# Altium PCB SIM7600_M_V2.0.1.PcbDoc
Units mil, origin at the board's own origin, x right, y up, seen from the top; angles counter-clockwise.
Board outline 5890 x 4596 mil, 4 copper layers (Top Layer, GND, PWR, Bottom Layer); 106 components, 93 nets, 416 pads, 111 vias.
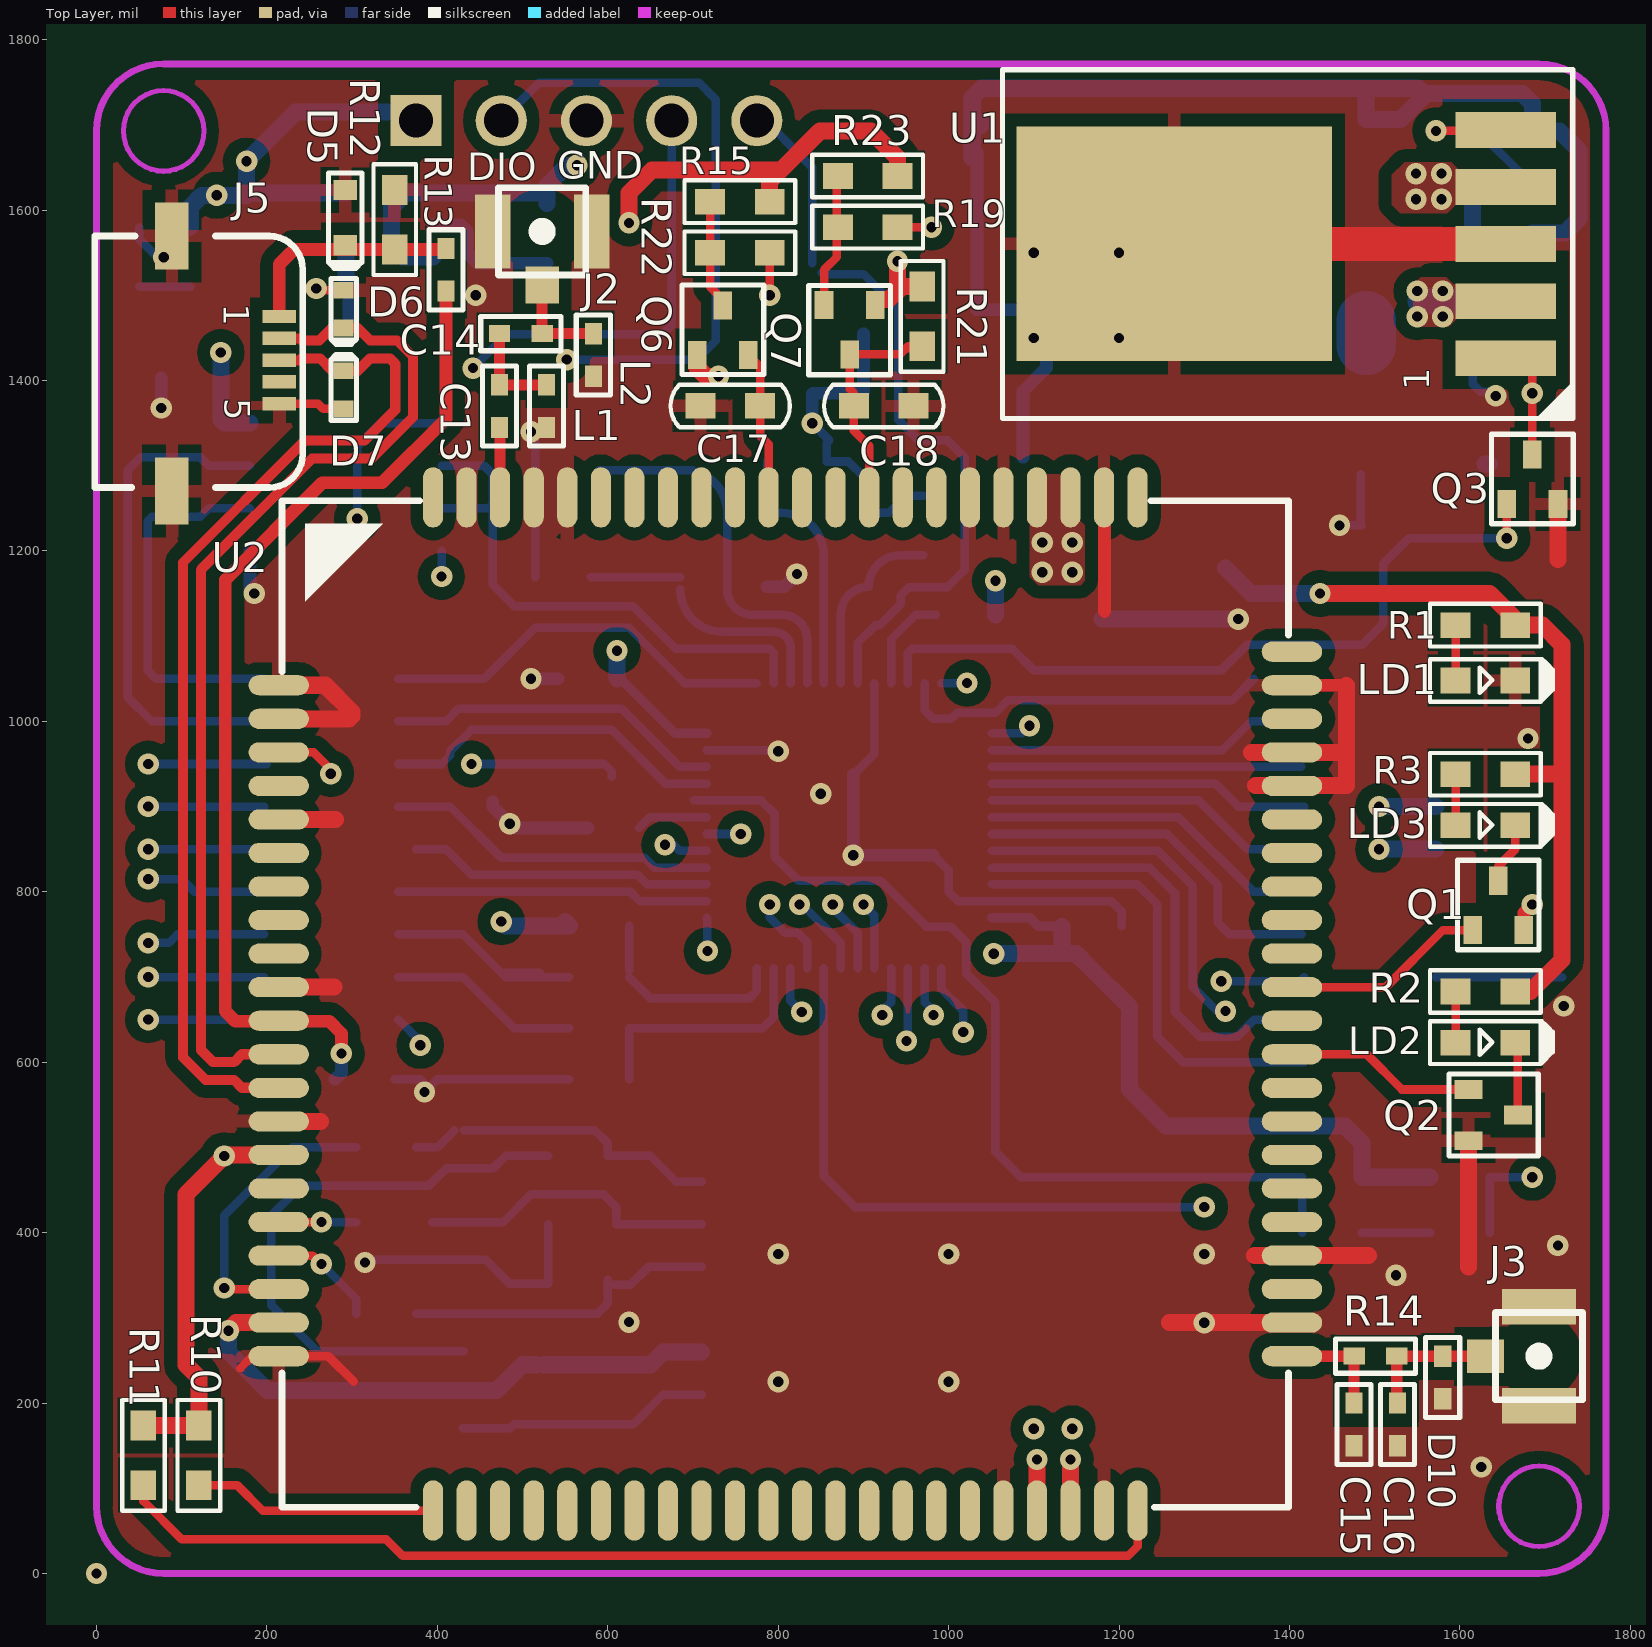
[diagram p0: Top Layer view]
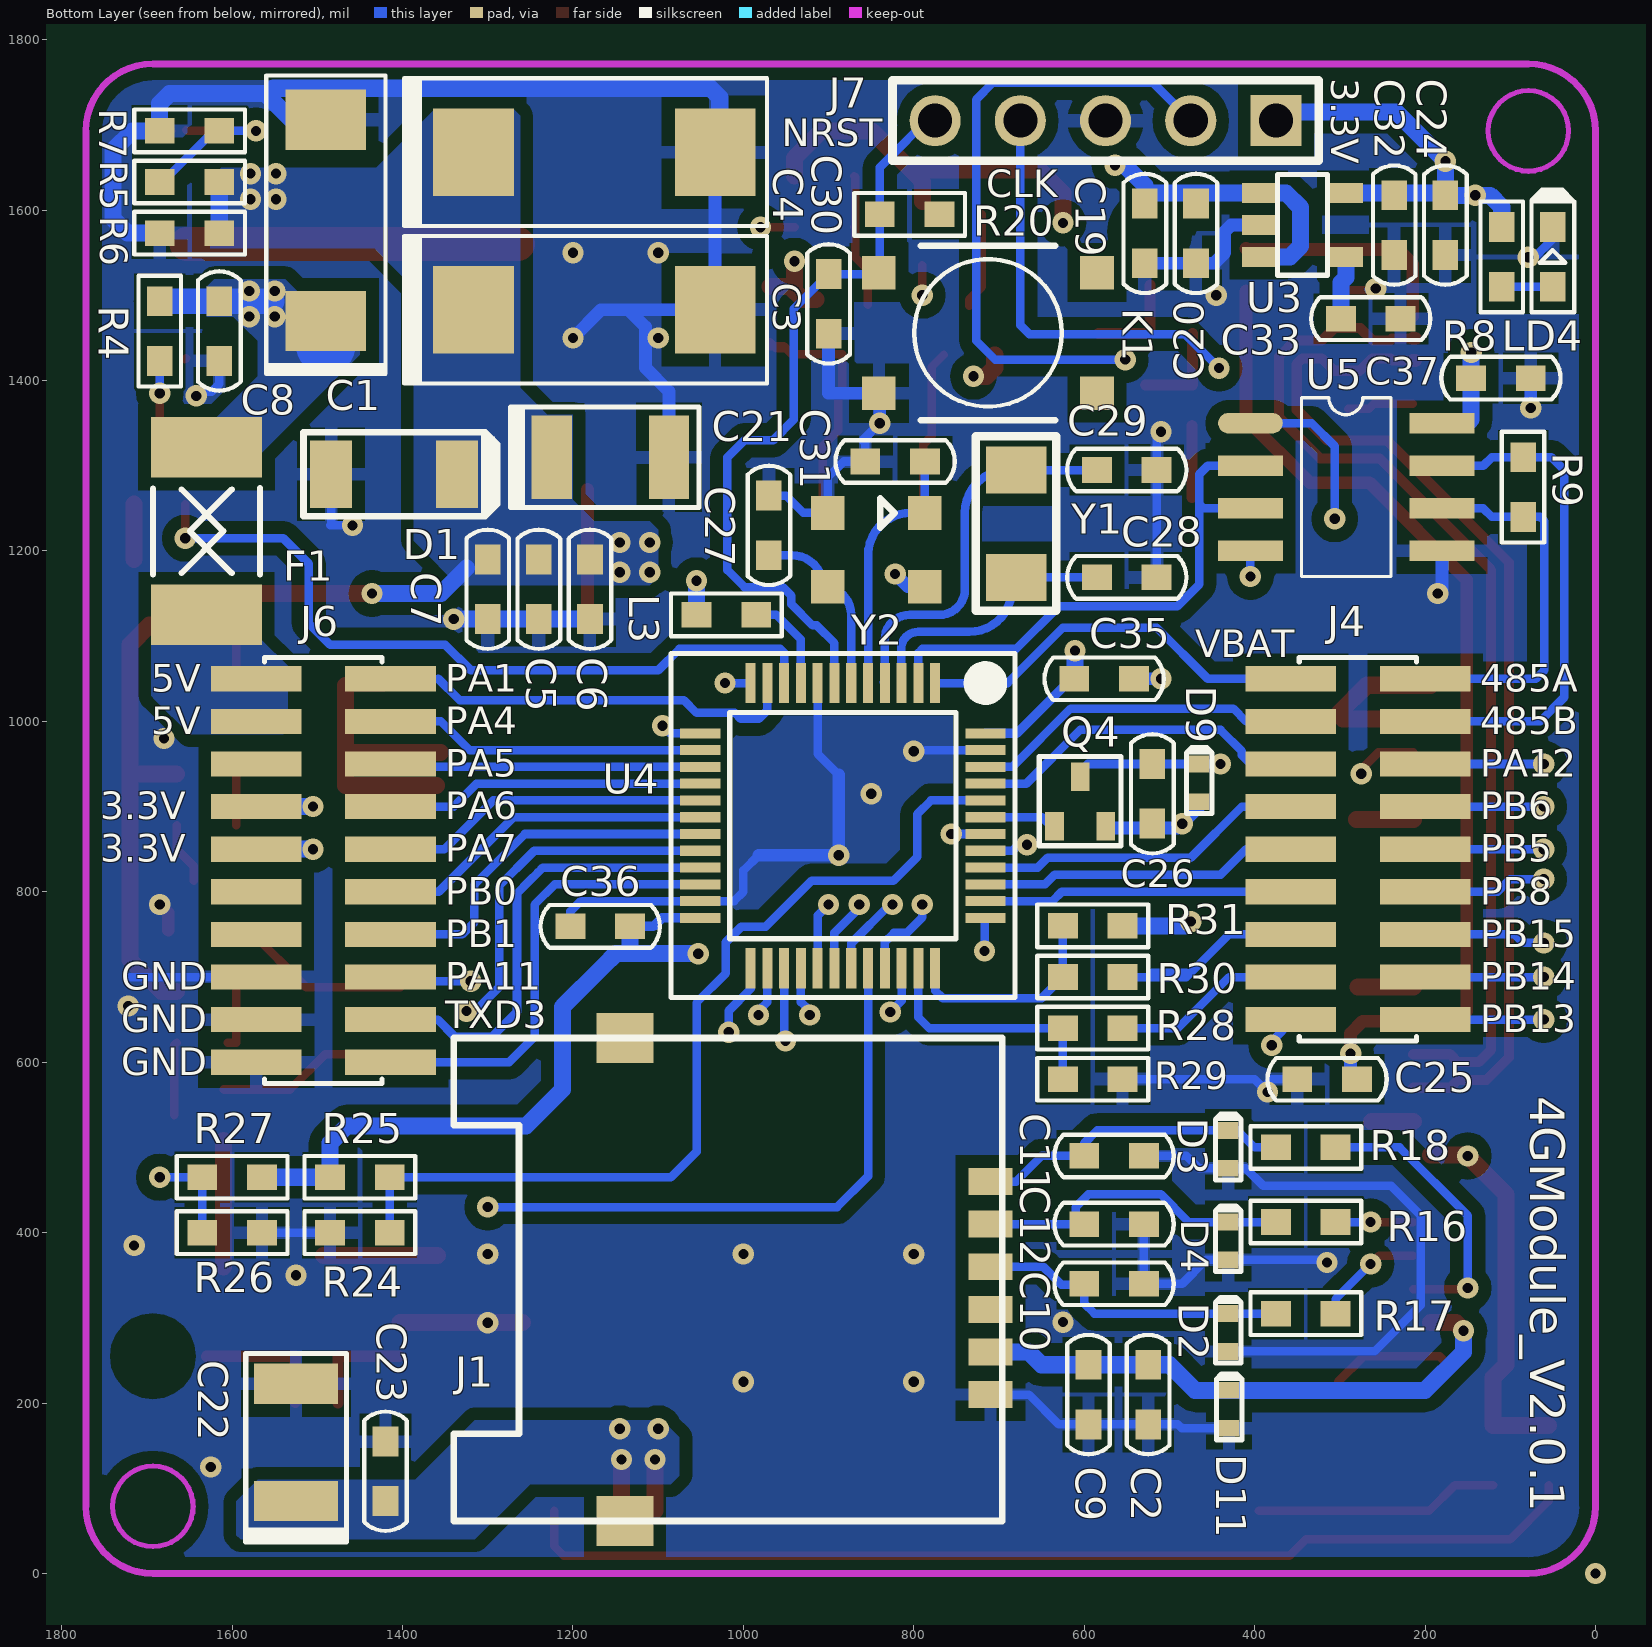
[diagram p1: Bottom Layer view, seen from below]
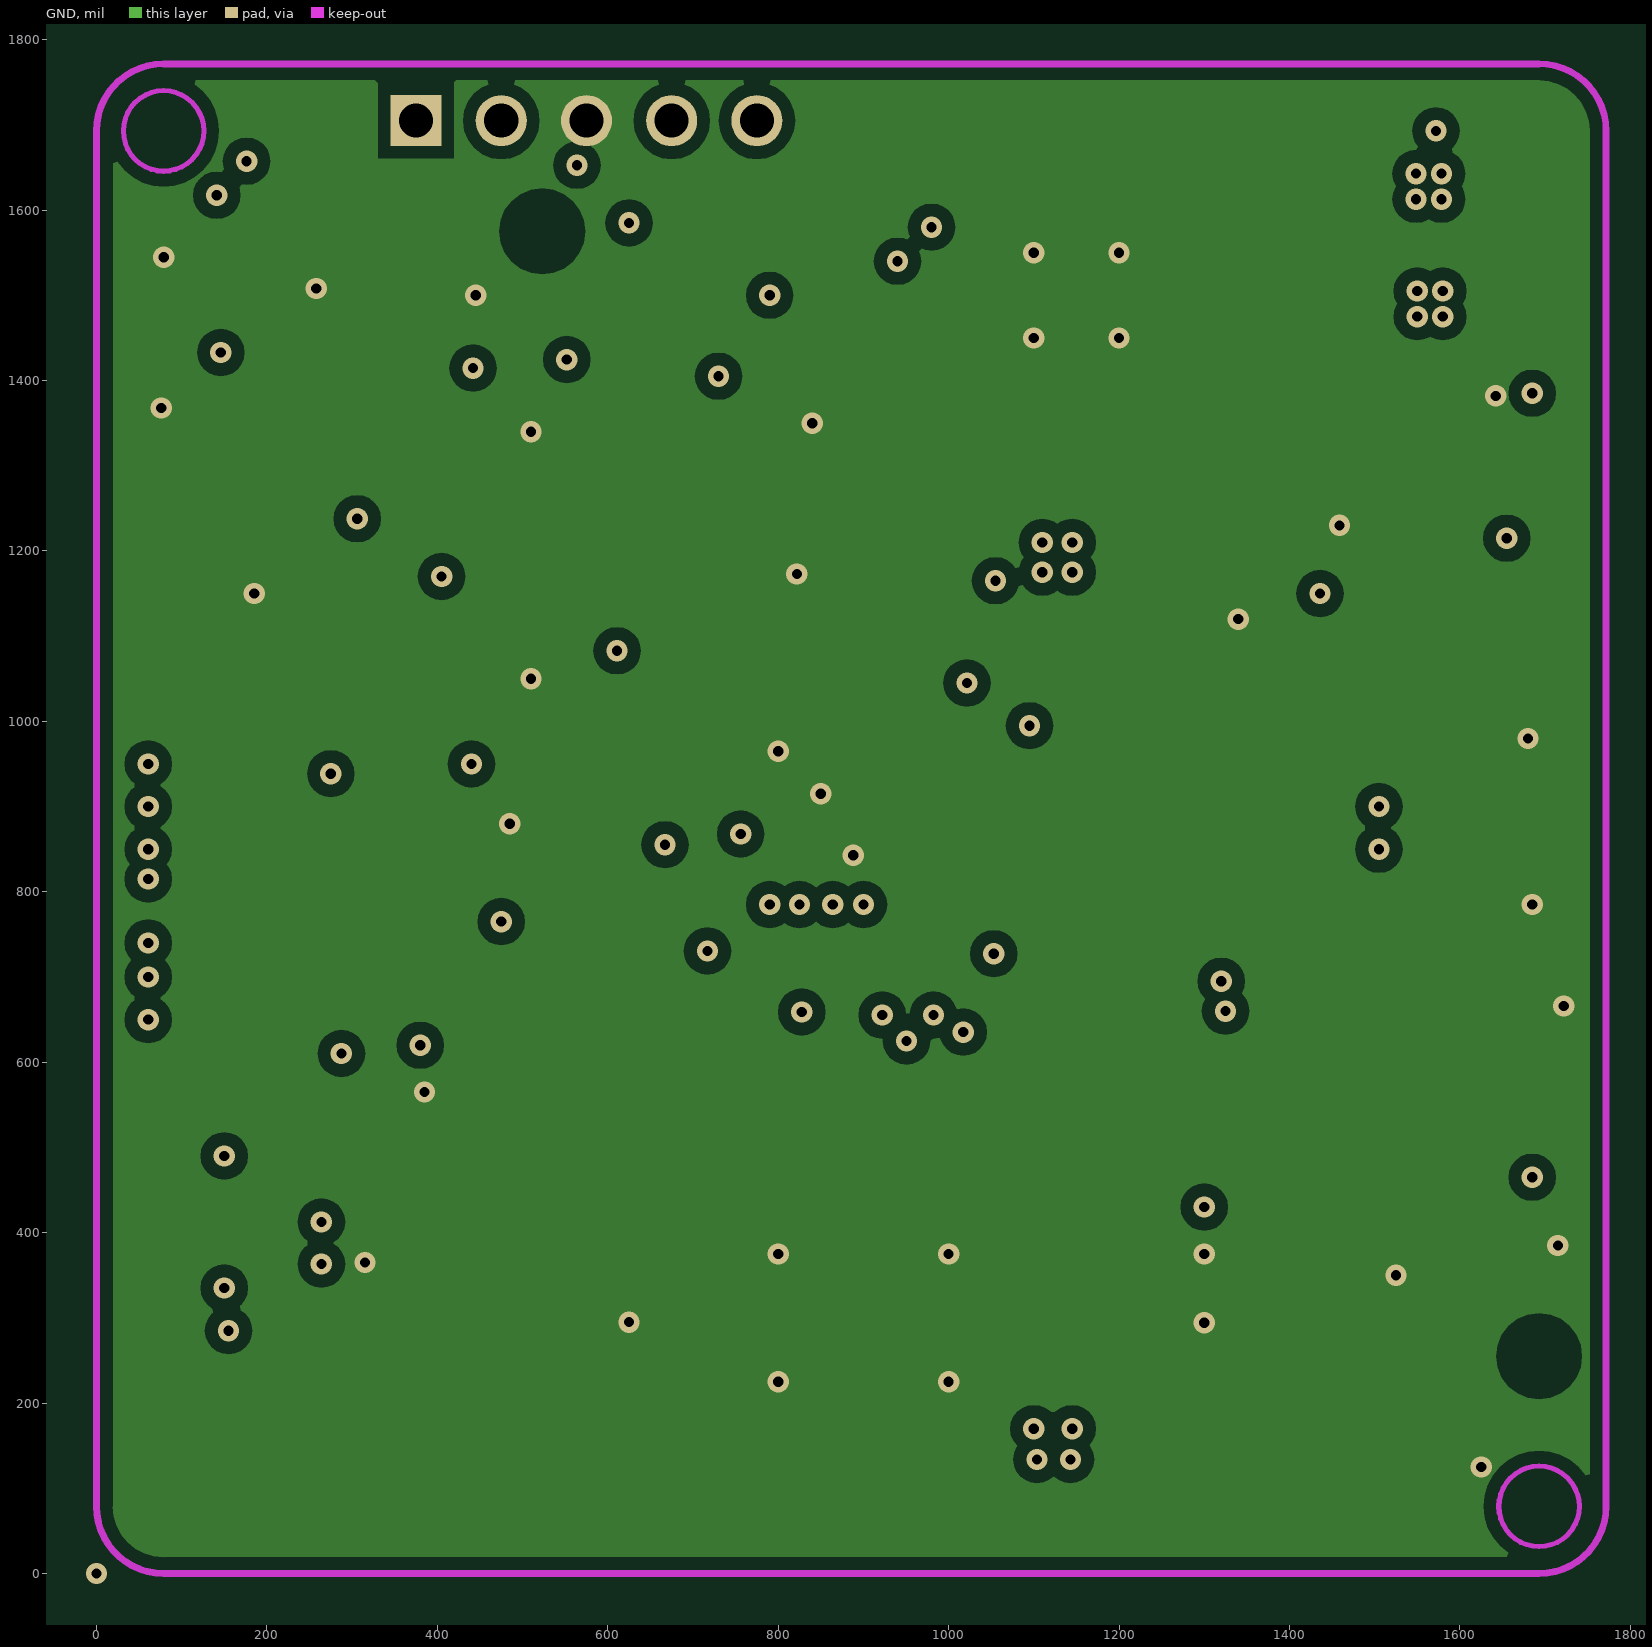
[diagram p2: GND]
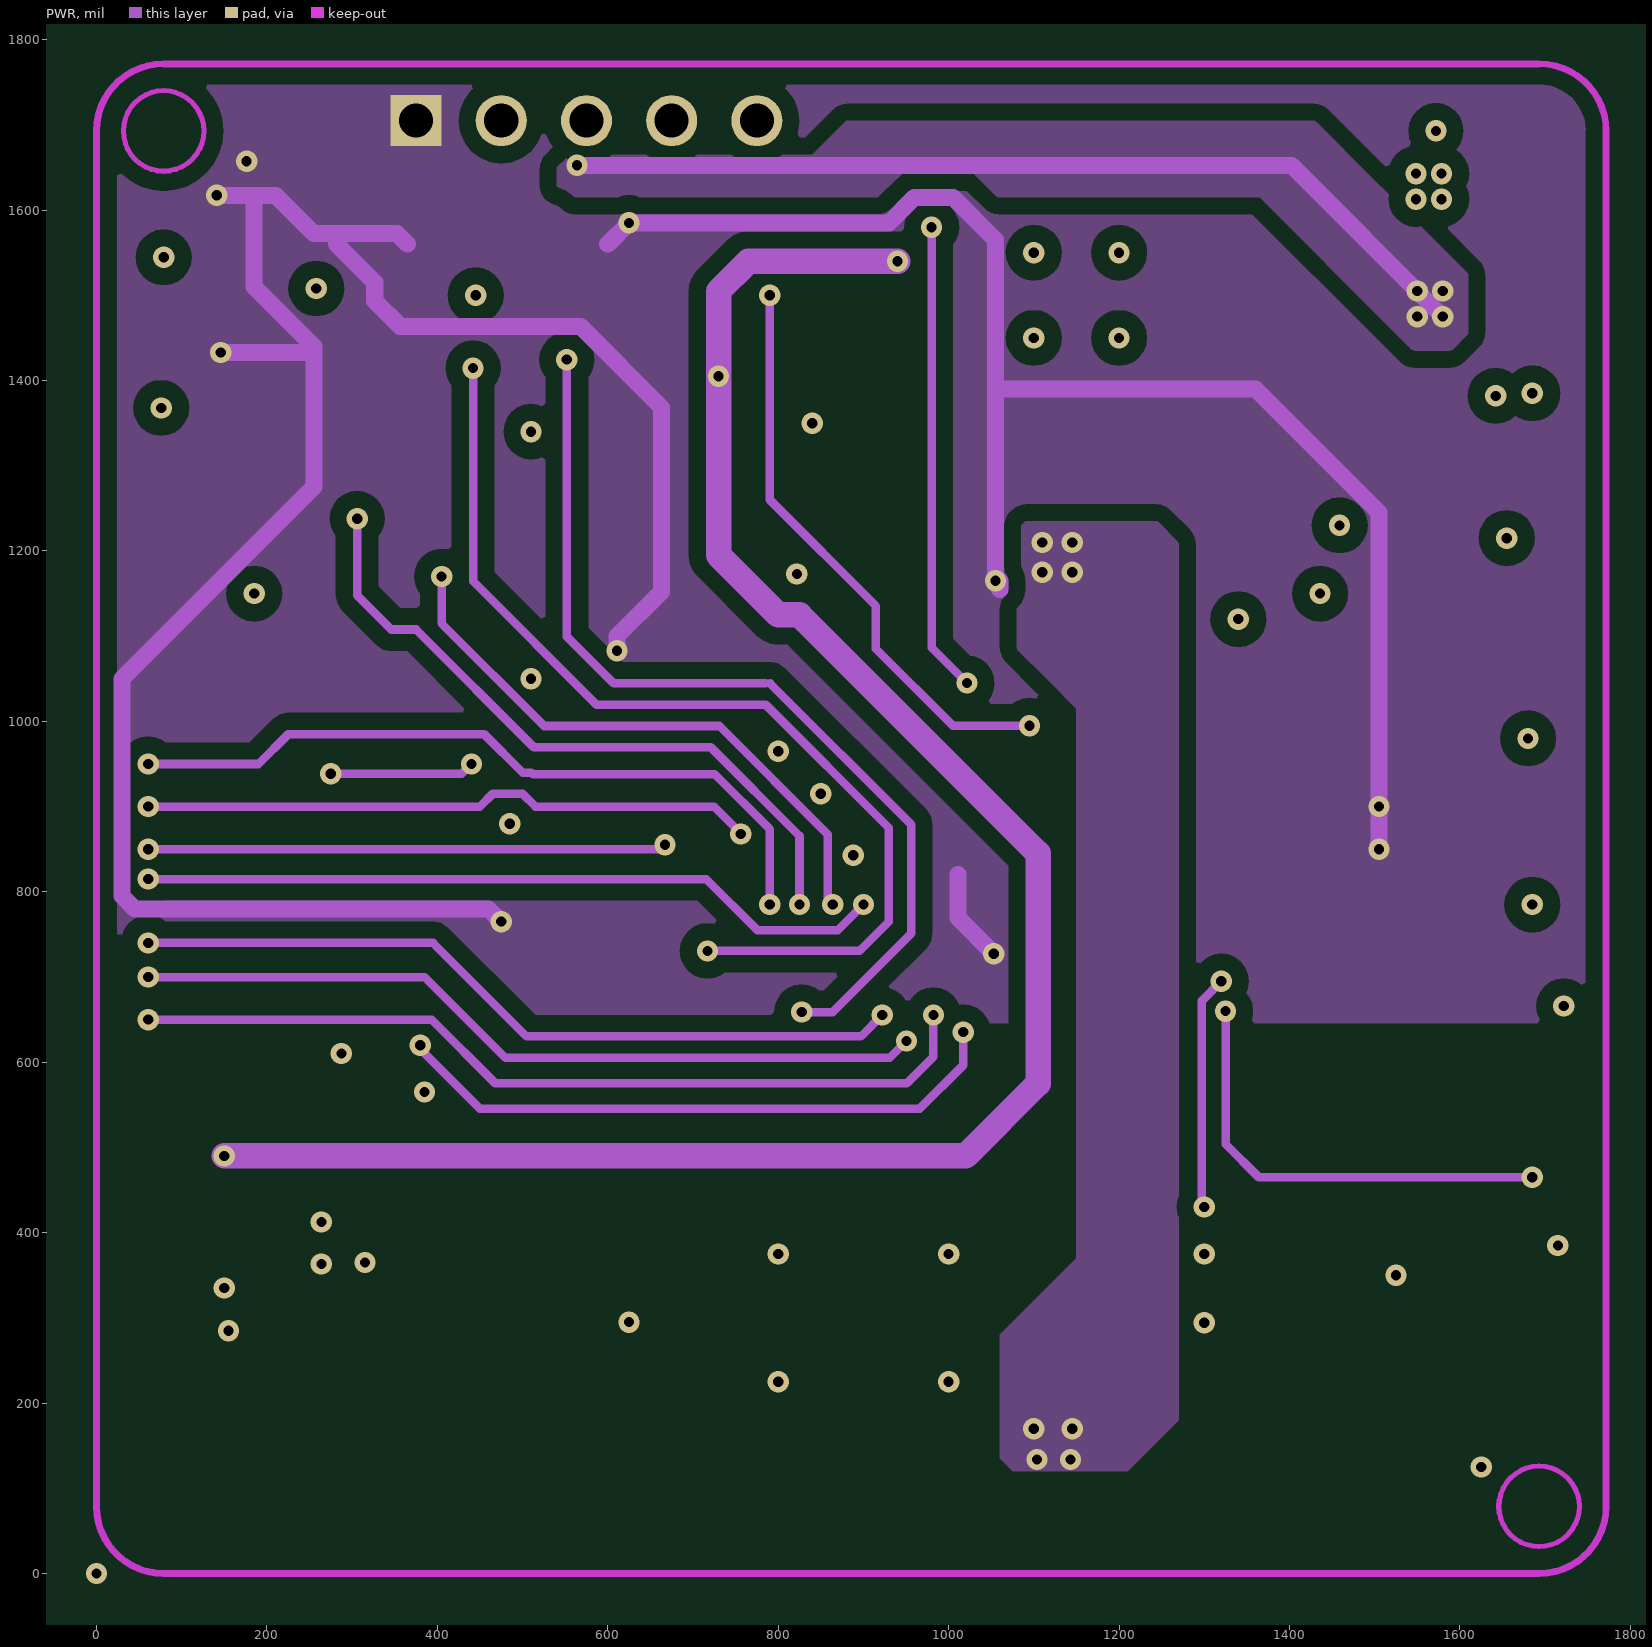
[diagram p3: PWR]

## Layer stack, top to bottom
Top Layer: signal copper 1.4
Dielectric: core 12.6, FR-4, Dk 4.8
GND: signal copper 1.4
Dielectric: prepreg 12.6, FR-4, Dk 4.8
PWR: signal copper 1.4
Dielectric: core 12.6, FR-4, Dk 4.8
Bottom Layer: signal copper 1.4

## Board outline
-1744.1,2857.4 -1744.1,-1531.6 -1698.1,-1577.6 3891.9,-1577.6 3937.9,-1531.6 4145.9,-1323.6 4145.9,2672.4 3799.9,3018.4 -1490.1,3018.4

## Design rules (kind name [scope] priority, off if disabled: settings)
Clearance [All] p1: gap=6
ComponentClearance [All] p1: gap=5 collisioncheckmode=2 verticalgap=10
DiffPairsRouting DiffPair_DiffPairsRouting [InDifferentialPair ('NewDifferentialPair1')] p1: maxlimit=100 minlimit=6 mostfreqgap=6 toplayer_mingap=9 toplayer_prefgap=9 midlayer1_mingap=9 midlayer1_prefgap=9 midlayer2_mingap=9 midlayer2_prefgap=9 bottomlayer_mingap=9 bottomlayer_prefgap=9 maxuncoupledlength=500
DiffPairsRouting [All] p2: maxlimit=100 minlimit=6 mostfreqgap=6 maxuncoupledlength=500
MatchedLengths DiffPair_MatchedLengths [InDifferentialPair ('NewDifferentialPair1')] p1: tolerance=1000 checknetsindiffpair=TRUE checkdiffpairvsdiffpair=TRUE checkothers=TRUE
PlaneClearance [All] p1: clearance=5.91
PlaneConnect [All] p1: planeconnectstyle=Relief reliefexpansion=20 reliefentries=4 reliefconductorwidth=20 reliefairgap=10
PolygonConnect [All] p1: connectstyle=Direct reliefconductorwidth=15 reliefentries=4 polygonreliefangle="90 Angle"
RoutingCorners [All] p1: cornerstyle=Round minsetback=393.7 maxsetback=393.7
RoutingVias [All] p1: holewidth=28 width=50 viastyle="Through Hole" minholewidth=12 minwidth=25 maxholewidth=50 maxwidth=50
SolderMaskExpansion [All] p1: expansion=4
TestPointUsage [All] p1: valid=0 allowmultiple=FALSE
Testpoint [All] p1: side=15 testpointundercomponent=TRUE minsize=40 maxsize=100 preferedsize=60 minholesize=0 maxholesize=40 preferedholesize=32 testpointgrid=1 style=1021 order=0123456789
Width DiffPair_Width [InDifferentialPair('NewDifferentialPair1')] p1: maxlimit=15 minlimit=12 preferedwidth=15 toplayer_prefwidth=12 midlayer1_prefwidth=12 midlayer2_prefwidth=12 bottomlayer_prefwidth=12 minimp=50.000000 maximp=50.000000 favimp=50.000000
Width [All] p2: maxlimit=200 minlimit=6 preferedwidth=15 minimp=50.000000 maximp=50.000000 favimp=50.000000
14 further rules are at their usual default settings.

## Classes and differential pairs
component class U_03-4G: C2 C9 C10 C11 C12 C13 C14 C15 C16 C17 C18 C21 C22 C23 C25 C26 D2 D3 D4 D5 D6 D7 D9 D10 D11 J1 J2 J3 J5 L1 L2 LD2 LD3 Q1 Q2 Q4 Q6 Q7 Q22 Q111 R2 R3 R10 R11 R12 R13 R14 R15 R16 R17 R18 R19 R21 R22 R23 U2
component class U_01-POWER: C1 C3 C4 C5 C6 C7 C8 C19 C20 C24 C32 C33 D1 F1 LD1 LD4 Q3 R1 R4 R5 R6 R7 R8 U1 U3
component class U_02-MCU: C27 C28 C29 C30 C31 C35 C36 C37 J4 J6 J7 K1 L3 R9 R20 R24 R25 R26 R27 R28 R29 R30 R31 U4 U5 Y1 Y2
differential pair NewDifferentialPair1: +4G_USB_P -4G_USB_N

## Components (designator, comment, footprint, x,y, rotation, side; value= is the part's Value field where it differs from the comment)
C1 "100uF/16V" C_TAN_C 1490,1588 r90 bottom
C2 "33PF" 0603_C 525,245 r270 bottom
C3 "220uF/10V" C_TAN_D 1175,1483 r180 bottom
C4 "220uF/10V" C_TAN_D 1175,1668 r180 bottom
C5 "0.1uF" 0603_C 1240,1120 r90 bottom
C6 "2.2μF" 0603_C 1180,1120 r90 bottom
C7 "33PF" 0603_C 1300,1120 r90 bottom
C8 "0.1uF" 0603_C 1615,1423.11 r90 bottom
C9 "0.1uF" 0603_C 595,245 r270 bottom
C10 "33PF" 0603_C 530,340 r0 bottom
C11 "33PF" 0603_C 530,490 r0 bottom
C12 "33PF" 0603_C 530,410 r0 bottom
C13 "27PF" 0402 473,1345 r90 top
C14 "27PF" 0402 473,1455 r0 top
C15 "NC" 0402 1475.87,150 r90 top
C16 "NC" 0402 1526.87,150 r90 top
C17 "1NF" 0603_C 778.7,1370.18 r180 top
C18 "100PF" 0603_C 958.9,1370.18 r180 top
C19 "1uF" 0603_C 528.82,1607.6 r270 bottom
C20 "0.1uF" 0603_C 468.82,1607.6 r270 bottom
C21 "47uF/10V" C_TAN_B 1225,1310 r180 bottom
C22 "47uF/10V" C_TAN_B 1525,85 r90 bottom
C23 "1uF" 0603_C 1420,155 r270 bottom
C24 "1uF" 0603_C 176.18,1617.4 r270 bottom
C25 "33PF" 0603_C 280,580 r0 bottom
C26 "0.1uF" 0603_C 520,880 r90 bottom
C27 "Cap" 0603_C 970,1195 r90 bottom
C28 "Cap" 0603_C 585,1169 r180 bottom
C29 "Cap" 0603_C 585,1295 r180 bottom
C30 "Cap" 0603_C 900,1455 r90 bottom
C31 "Cap" 0603_C 786.95,1305 r0 bottom
C32 "0.1uF" 0603_C 236.18,1617.4 r270 bottom
C33 "10nF" 0603_C 298.82,1472.6 r180 bottom
C35 "Cap" 0603_C 611.65,1050 r180 bottom
C36 "Cap" 0603_C 1133,759.41 r0 bottom
C37 "Cap" 0603_C 145.94,1402.83 r180 bottom
D1 "BZV55C5V1" SOD-80 1410,1290 r180 bottom
D2 "ESD9M5.0ST5G" SOD-923 431,305 r270 bottom
D3 "ESD9M5.0ST5G" SOD-923 431,520 r270 bottom
D4 "ESD9M5.0ST5G" SOD-923 431,412.48 r270 bottom
D5 "PESD12VS1UB" SOD523 291.72,1623.7 r90 top
D6 "ESD9L5.0ST5G" SOD-923 290,1461.54 r90 top
D7 "ESD9L5.0ST5G" SOD-923 290,1411.41 r270 top
D9 "ESD9M5.0ST5G" SOD-923 465,950 r270 bottom
D10 "LXES15AAA1-153" 0402 1579.87,255 r270 top
D11 "ESD9M5.0ST5G" SOD-923 430,215 r270 bottom
F1 "Fuse 2A" 1812_F 1630,1125 r90 bottom
J1 "SIM_Card" MicroSIM-6 710,210 r90 bottom
J2 "CON2" RF-Z 523,1575 r0 top
J3 "CON2" RF-Z 1692.87,255 r270 top
J4 "HEADER2X9" DSP1.27-1.27-18 357.48,1050 r180 bottom
J5 "USB" MICROUSB_SMD1 108,1424 r270 top
J6 "Header2X10" DSP1.27-1.27-20 1571.65,1050 r180 bottom
J7 "XH2.54-5P" SIP5 375,1705 r0 bottom
K1 "KEY" KEY_SMD5465 585,1385 r0 bottom
L1 "NC" 0402 528,1345 r90 top
L2 "NC" 0402 583,1405 r90 top
L3 "Inductor" 0603_R 1055,1125 r180 bottom
LD1 "WHITE" LED_0603 1595,1048 r0 top
LD2 "WHITE" LED_0603 1595,623 r0 top
LD3 "WHITE" LED_0603 1595,878 r0 top
LD4 "WHITE" LED_0603 50,1510 r90 bottom
Q1 "DTC143ZEBTL" SC-85 1615,755 r0 top
Q2 "DTC143ZEBTL" SC-85 1610,568 r270 top
Q3 "DTC143ZEBTL" SC-85 1655,1255 r0 top
Q4 "DTC143ZEBTL" SC-85 634.81,877 r180 bottom
Q6 "DTC143ZEBTL" SC-85 705,1430 r0 top
Q7 "DTC143ZEBTL" SC-85 913.9,1488.74 r180 top
R1 "1K" 0603_R 1665,1113 r180 top
R2 "1K" 0603_R 1665,683 r180 top
R3 "1K" 0603_R 1665,938 r180 top
R4 "47K" 0603_R 1685,1493.11 r270 bottom
R5 "100K" 0603_R 1685,1633 r180 bottom
R6 "750R" 0603_R 1685,1573 r180 bottom
R7 "47K" 0603_R 1615,1693 r0 bottom
R8 "1K" 0603_R 110,1580 r270 bottom
R9 "100Ω" 0603_R 85,1310 r270 bottom
R10 "NC" 0603_R 120.08,173.66 r270 top
R11 "NC" 0603_R 55.08,173.66 r270 top
R12 "47K" 0603_R 350,1553.74 r90 top
R13 "0R" 0402 410,1505 r90 top
R14 "0R" 0402 1525.87,255 r180 top
R15 "10K" 0603_R 790,1610 r180 top
R16 "22R" 0603_R 375,412.48 r180 bottom
R17 "22R" 0603_R 375,305 r180 bottom
R18 "22R" 0603_R 375,500 r180 bottom
R19 "0R" 0603_R 940,1580 r180 top
R20 "Res3" 0603_R 840,1595 r180 bottom
R21 "20K" 0603_R 968.9,1510.18 r270 top
R22 "0R" 0603_R 790,1550 r180 top
R23 "10K" 0603_R 870,1640 r0 top
R24 "Res3" 0603_R 1485,400 r180 bottom
R25 "Res3" 0603_R 1415,465 r0 bottom (schematic designator 25)
R26 "Res3" 0603_R 1565,400 r0 bottom
R27 "Res3" 0603_R 1635,465 r180 bottom
R28 "Res3" 0603_R 555,640 r0 bottom
R29 "Res3" 0603_R 625,580 r180 bottom
R30 "Res3" 0603_R 555,700 r0 bottom
R31 "Res3" 0603_R 625,760 r180 bottom
U1 "MIC29302" TO-263-5 1653.7,1426.18 r90 top
U2 "SIM7600CE" SIM7600 213.9,1042.4 r0 top locked
U3 "LD3985M33R" SOT23-5L 343.82,1582.6 r270 bottom
U4 "STM32F103C8T6" LQFP48 775,1045 r0 bottom
U5 "MAX3485ESA" SO8 405,1350 r180 bottom
Y1 "32.768K" 3215 680,1295 r270 bottom
Y2 "8MHz" CRY_S3225 850,1205 r270 bottom

## Footprints (in the part's own frame and the unit in brackets; to place one, negate y for a bottom-side part, rotate by r counter-clockwise, add the part's x,y. Pads: shape width x height; smd on the part's side, far side on the other; paste and mask are expansions set on the pad)
0402 [mil]
  rect 25x20 smd: 1(0,0) 2(50,0)
  silkscreen extent -22,-20 72,20
0603_C [mil]
  rect 35x30 smd: 1(0,0) 2(70,0)
  silkscreen extent -35,-25 105,25, body extent 5,-15 65,15, height 39
0603_R [mil]
  rect 35x30 smd: 1(0,0) 2(70,0)
  silkscreen extent -30,-25 100,25, body extent 5,-15 65,15, height 39
1812_F [mm]
  rect 1.8x3.3 smd: 1(0,0) 2(5,0)
  silkscreen extent 1.2,-1.6 3.78,1.6
3215 [mm]
  rect 1.4x1.8 smd: 1(0,0)
  rect 1.4x1.8 smd paste+0: 2(3.2,0)
  silkscreen extent -1,-1.2 4.2,1.2
C_TAN_B [mm]
  rect 1.2x2.5 smd: 1(0,0) 2(3.5,0)
  silkscreen extent -1.22,-1.5 4.39,1.51, body extent 0,-1.5 3.5,1.5, height 2
C_TAN_C [mm]
  rect 1.8x2.4 smd: 1(-3,0) 2(3,0)
  silkscreen extent -4.57,-1.78 4.32,1.78, body extent -3,-1.78 3,1.78, height 2.6
C_TAN_D [mm]
  rect 2.4x2.6 smd: 1(-3.6,0) 2(3.6,0)
  silkscreen extent -5.67,-2.2 5.15,2.2, body extent -3.67,-2.2 3.53,2.2, height 4.3
CRY_S3225 [mm]
  rect 1x1 smd: 1(-1.005,1.602) 2(-1.005,-1.298) 3(1.195,-1.298) 4(1.195,1.602)
  silkscreen extent -1.44,0.27 -0.57,0.7, body extent -1.61,-1.9 1.8,2.2, height 1
DSP1.27-1.27-18 [mm]
  rect 2.7x0.75 smd: 1(0,0) 2(4,0) 3(0,-1.27) 4(4,-1.27) 5(0,-2.54) 6(4,-2.54) 7(0,-3.81) 8(4,-3.81) 9(0,-5.08) 10(4,-5.08) 11(0,-6.35) 12(4,-6.35) 13(0,-7.62) 14(4,-7.62) 15(0,-8.89) 16(4,-8.89) 17(0,-10.16) 18(4,-10.16)
  silkscreen extent 0.25,-10.79 3.75,0.64
DSP1.27-1.27-20 [mm]
  rect 2.7x0.75 smd: 1(0,0) 2(4,0) 3(0,-1.27) 4(4,-1.27) 5(0,-2.54) 6(4,-2.54) 7(0,-3.81) 8(4,-3.81) 9(0,-5.08) 10(4,-5.08) 11(0,-6.35) 12(4,-6.35) 13(0,-7.62) 14(4,-7.62) 15(0,-8.89) 16(4,-8.89) 17(0,-10.16) 18(4,-10.16) 19(0,-11.43) 20(4,-11.43)
  silkscreen extent 0.25,-12.06 3.75,0.64
KEY_SMD5465 [mm]
  rect 1x1 smd: 1(0,0) 2(0,-3.6) 3(6.5,0) 4(6.5,-3.6)
  silkscreen extent 1.05,-4.4 5.45,0.8, body extent -0.25,-4.06 6.73,0.46, height 1.5
LED_0603 [mil]
  rect 35x30 smd: A(0,0) K(70,0)
  silkscreen extent -30,-25 114,25
LQFP48 [mm]
  rect 0.3x1.2 smd: 1(0,0) 2(0.5,0) 3(1,0) 4(1.5,0) 5(2,0) 6(2.5,0) 7(3,0) 8(3.5,0) 9(4,0) 10(4.5,0) 11(5,0) 12(5.5,0) 25(5.5,8.5) 26(5,8.5) 27(4.5,8.5) 28(4,8.5) 29(3.5,8.5) 30(3,8.5) 31(2.5,8.5) 32(2,8.5) 33(1.5,8.5) 34(1,8.5) 35(0.5,8.5) 36(0,8.5)
  rect 1.2x0.3 smd: 13(7,1.5) 14(7,2) 15(7,2.5) 16(7,3) 17(7,3.5) 18(7,4) 19(7,4.5) 20(7,5) 21(7,5.5) 22(7,6) 23(7,6.5) 24(7,7) 37(-1.5,7) 38(-1.5,6.5) 39(-1.5,6) 40(-1.5,5.5) 41(-1.5,5) 42(-1.5,4.5) 43(-1.5,4) 44(-1.5,3.5) 45(-1.5,3) 46(-1.5,2.5) 47(-1.5,2) 48(-1.5,1.5)
  silkscreen extent -2.38,-0.88 7.88,9.38
MicroSIM-6 [mm]
  rect 1.5x1.7 smd: 0(-3.77,10.9) 0(10.63,10.9)
  rect 0.8x1.3 smd: 1(1.27,0) 2(3.81,0) 3(6.35,0) 5(0,0) 6(2.54,0) 7(5.08,0)
  silkscreen extent -3.77,-0.35 10.63,16
MICROUSB_SMD1 [mm]
  rect 0.4x1 smd: 1(-1.299,2.705) 2(-0.649,2.705) 3(0.001,2.705) 4(0.651,2.705) 5(1.301,2.705)
  rect 2x1 smd: 6(-3.699,-0.495) 7(3.901,-0.495)
  silkscreen extent -3.7,-2.8 3.8,3.4
RF-Z [mm]
  rect 1x1.1 smd: 1(0,-1.6)
  rect 1.05x2.2 smd: 2(-1.475,0) 2(1.475,0)
  silkscreen extent -1.3,-1.3 1.3,1.3
SC-85 [mil]
  rect 22x33 smd: 1(0,0) 2(60,0) 3(30,58)
  silkscreen extent -18,-23 78,82
SIM7600 [mm]
  oval 1.8x0.6 smd: 1(0,0) 2(0,-1) 3(0,-2) 4(0,-3) 5(0,-4) 6(0,-5) 7(0,-6) 8(0,-7) 9(0,-8) 10(0,-9) 11(0,-10) 12(0,-11) 13(0,-12) 14(0,-13) 15(0,-14) 16(0,-15) 17(0,-16) 18(0,-17) 19(0,-18) 20(0,-19) 41(30.2,-19) 42(30.2,-18) 43(30.2,-17) 44(30.2,-16) 45(30.2,-15) 46(30.2,-14) 47(30.2,-13) 48(30.2,-12) 49(30.2,-11) 50(30.2,-10) 51(30.2,-9) 52(30.2,-8) 53(30.2,-7) 54(30.2,-6) 55(30.2,-5) 56(30.2,-4) 57(30.2,-3) 58(30.2,-2) 59(30.2,-1) 60(30.2,0) 81(0,-20) 82(30.2,-20) 85(30.2,1)
  oval 0.6x1.8 smd: 21(5.6,-24.6) 22(6.6,-24.6) 23(7.6,-24.6) 24(8.6,-24.6) 25(9.6,-24.6) 26(10.6,-24.6) 27(11.6,-24.6) 28(12.6,-24.6) 29(13.6,-24.6) 30(14.6,-24.6) 31(15.6,-24.6) 32(16.6,-24.6) 33(17.6,-24.6) 34(18.6,-24.6) 35(19.6,-24.6) 36(20.6,-24.6) 37(21.6,-24.6) 38(22.6,-24.6) 39(23.6,-24.6) 40(24.6,-24.6) 61(24.6,5.6) 62(23.6,5.6) 63(22.6,5.6) 64(21.6,5.6) 65(20.6,5.6) 66(19.6,5.6) 67(18.6,5.6) 68(17.6,5.6) 69(16.6,5.6) 70(15.6,5.6) 71(14.6,5.6) 73(12.6,5.6) 74(11.6,5.6) 75(10.6,5.6) 76(9.6,5.6) 77(8.6,5.6) 78(7.6,5.6) 79(6.6,5.6) 80(5.6,5.6) 83(25.6,-24.6) 84(4.6,-24.6) 86(4.6,5.6) 87(25.6,5.6)
  oval 0.6x1.8 smd paste+0: 72(13.6,5.6)
  silkscreen extent 0.1,-24.5 30.1,5.5
SIP5 [mil] "SIP5"
  rect 60x60 hole 40: 1(0,0)
  round 60 hole 40: 2(100,0) 3(200,0) 4(300,0) 5(400,0)
  silkscreen extent -50,-47 450,47
SO8 [mil]
  oval 76x24 smd: 1(0,0)
  rect 76x24 smd: 2(0,-50) 3(0,-100) 4(0,-150) 5(225,-150) 6(225,-100) 7(225,-50) 8(225,0)
  silkscreen extent 60,-180 165,30
SOD523 [mm]
  rect 0.6x0.7 smd: 1(0,0) 2(-1.65,0)
  silkscreen extent -2.34,-0.5 0.51,0.5
SOD-80 [mm]
  rect 1.25x2 smd: 1(-1.875,0) 2(1.875,0)
  silkscreen extent -2.7,-1.25 3.08,1.25
SOD-923 [mm]
  rect 0.5x0.6 smd: 1(1.129,0) 2(0,0)
  silkscreen extent -0.48,-0.38 1.47,0.38
SOT23-5L [mm]
  rect 0.6x1 smd: 1(-0.95,-1.3) 2(0,-1.3) 3(0.95,-1.3) 4(0.95,1.3) 5(-0.95,1.3)
  silkscreen extent -1.5,-0.75 1.5,0.75
TO-263-5 [mm]
  rect 1.07x3 smd: 1(0,0) 2(1.7,0) 3(3.4,0) 4(5.1,0) 5(6.8,0)
  rect 7x9.4 smd: 6(3.41,9.878)
  silkscreen extent -1.8,-2 8.6,15, body extent 0,0 6.8,12.6, height 4.5

## Part data
C1 C3 C4 C19 C21 C22 C33: library part ECAP, "E-CAP"
C2 C9 C10 C11 C12 C13 C14 C15 C16 C25: library part CAP, "CAP"
C5 C6 C7 C8 C17 C18 C23 C26: library part "Cap Semi", "Capacitor"
C20 C24 C32: library part "Cap Semi_1", "Capacitor"
C27 C28 C29 C30 C31 C35 C36 C37: "Capacitor"
D1 D9 D11: library part "DIODE SCHOTTKY"
D2 D3 D4 D5 D6 D7 D10: library part "DIODE TVS BI-DIR"
F1: library part "Fuse 1", "Fuse"
J4: library part Header2X10
J5: library part USB-M
J7: library part "Header 5H", "Header, 5-Pin, Right Angle"
L1 L2: library part L
LD1 LD2 LD3 LD4: library part LED, "LED"
Q1 Q2 Q3 Q4: library part NPN
Q6 Q7: library part DTC143ZETL
R1 R2 R3 R6 R8 R9 R10 R11 R12 R13 R14 R15 R19 R21 R22 R23 R24 R25: library part RES1
R4 R5 R7 R16 R17 R18: library part R0.25W, "RESISTOR"
R20 R26 R27 R28 R29 R30 R31: "Resistor"
U2: library part L506
U3: library part AMS1117-3.3
U5: library part MAX485
Y1: library part XTAL, "Crystal Oscillator"
Y2: library part CRYSTAL_S4_1, "CRYSTAL_S4_PASSIVE"

## Via types
v1: diameter 25, hole 12, Top Layer to Bottom Layer, tented both sides, 111 vias

## Nets (pads, with @x,y where several pads share a name; then routed paths per layer and width w, separated by ;. In a path a pad name is that pad's centre, name@x,y a point inside that pad or via, vN(x,y) a via of type N, cw(c..) or ccw(c..) an arc to the next point about the centre after c; other vN are vias at no path point)
3V3: R20.2
4G_MAIN_ANT: C15.2 R14.2 U2.82 | length 128
  Top Layer w13: U2.82 R14.2 C15.2
4G_NETLIGHT: Q1.1 U2.51 | length 239.8
  Top Layer w10: U2.51 1513.07,688.07 1580,755 Q1.1
4G_STATUS: Q2.1 U2.49 | length 224.2
  Top Layer w10: U2.49 1490.67,609.33 1532,568 Q2.1
4G_USB_N: D6.2 J5.2 U2.12 | length 1240
  Top Layer w12: U2.12 170.64,609.33 161.45,600.15 136.98,600.15 122.5,614.63 122.5,1177.81 253.19,1308.5 323.19,1308.5 371.5,1356.81 371.5,1428.2 352.73,1446.97 321.26,1446.97 306.69,1461.54 D6.2 275.9,1461.54 261.33,1446.97 240.96,1446.97 238.66,1449.27 J5.2@214.49,1449.27
  Top Layer w15: J5.2@211.19,1449.27 J5.2@214.49,1449.27
4G_USB_P: D7.2 J5.3 U2.13 | length 1240
  Top Layer w12: U2.13 170.64,569.96 161.45,579.15 128.28,579.15 101.5,605.93 101.5,1186.5 244.5,1329.5 314.5,1329.5 350.5,1365.5 350.5,1419.5 344.03,1425.97 321.19,1425.97 306.63,1411.41 D7.2 276.82,1411.41 262.26,1425.97 240.96,1425.97 238.66,1423.68 J5.3@214.49,1423.68
  Top Layer w15: J5.3@211.19,1423.68 J5.3@214.49,1423.68
4G_USB_VBUS: C25.1 R13.1 U2.11 | length 1197.4
  Top Layer w15: 162.3,648.7 151,660 151,1166 265,1280 335,1280 410,1355 R13.1 ; 163,648 273.26,648 287.4,633.86 v1(287.4,610.24) ; U2.11@213.2,648 U2.11
  Bottom Layer w15: C25.1 287.4,587.4 v1(287.4,610.24)
485_A: J4.2 R9.2 U5.6 | length 442.2
  Bottom Layer w10: U5.6 131.65,1250 121.65,1240 65,1240 60,1235 60,1060 70,1050 J4.2@196.85,1050
485_B: J4.4 R9.1 U5.7 | length 592.3
  Bottom Layer w10: U5.7 131.65,1300 121.65,1310 51.65,1310 36.65,1295 36.65,1028.35 65,1000 J4.4@196.85,1000
485_CTRL: U4.2 U5.2 U5.3 | length 653.7
  Bottom Layer w10: U5.3 460,1250 465,1255 ; U5.2 455,1300 465,1290 465,1255 ; U4.2 794.69,1080.32 790,1085 680,1085 630,1135 490.8,1135 465,1160.8 465,1255
+3.3V: C24.1 C32.1 C35.1 C36.1 C37.1 J6.7 J6.9 J7.1 L3.1 R8.1 R15.1 R23.2 R25.2 R27.2 R31.2 U3.5 U4.24 U4.48 U5.8 | length 6759.2
  Top Layer w20: v1(625,1585) 625,1620 652.06,1647.06 803.28,1647.06 848.82,1692.6 908.82,1692.6 940,1661.42 R23.2 ; R15.1 790,1633.78 796.22,1640 807.28,1651.06
  PWR w20: v1(141.18,1617.4) 210.2,1617.4 255,1572.6 352.4,1572.6 365,1560 ; v1(145.94,1432.83) 252.83,1432.83 ; 185,1617.4 185,1510 255,1440 255,1275 30,1050 30,795 45,780 460,780 v1(475,765) ; 281.52,1560 326.52,1515 326.52,1493.48 356.38,1463.62 567.9,1463.62 663.02,1368.5 663.02,1151.98 ; 600,1560 v1(625,1585) 930,1585 960,1615 1005,1615 1055,1565 v1(1055,1165) ; v1(610.94,1082.83) 610.94,1100.06 662.94,1152.06 ; 1010.84,820.38 1010.84,769.57 v1(1053,727.41) ; 1055,1390 1360,1390 1505,1245 v1(1505,850) ; v1@1060,1155 v1@1060,1165
  Bottom Layer w11: C35.1@610.94,1050.71 614.29,1050.71 679.06,985.94 U4.48 ; U4.24 1095.59,769.41 1105.59,759.41 C36.1
  Bottom Layer w20: R8.1 110,1603.78 123.62,1617.4 C24.1 ; v1(145.94,1432.83) 145.94,1354.06 150,1350 U5.8 ; U3.5 178.78,1620 C24.1 ; J7.1@375,1715 233.78,1715 v1(176.18,1657.4) C24.1 ; v1(475,765) 480,760 R31.2 R31.2@550,765 ; v1(610.94,1082.83) 610.94,1050.71 C35.1 ; v1(1053,727.41) 1149.76,727.41 1164.88,712.28 1212.17,665 1212.17,567.83 1255,525 1465,525 1485,505 R25.2 R27.2 ; L3.1 v1(1055,1165) ; 1133,729.41 C36.1 ; v1(1505,850) J6.9 ; v1(1505,900) J6.7
+3.8V: C3.1 C4.1 C5.2 C6.2 C7.2 C21.1 C22.1 C23.2 D1.2 R1.1 R2.1 R3.1 R5.2 R6.2 U1.4 U2.38 U2.39 U2.62 U2.63 | length 1104.7
  Top Layer w20: U2.38 v1(1103.66,133.9) ; U2.39 v1(1143.03,133.9) ; v1(1435.87,1150) 1635,1150 R1.1@1665,1120 ; R2.1 1683,683 1720,720 1720,1090 1697,1113 R1.1 ; R3.1 1720,938
  Bottom Layer w20: 1325,1180 1355,1150 v1(1435.87,1150) ; R6.2 R5.2
  other v1: 1100,170 1145,170 1110,1175 1145,1175 1110,1210 1145,1210 1548.54,1612.82 1578.54,1612.82 1548.54,1642.82 1578.54,1642.82
+5V: C1.1 C8.2 C19.1 C20.1 F1.2 R4.1 U1.2 U3.1 U3.3 | length 1604.2
  PWR w20: v1(563.82,1652.6) 1402.4,1652.6 v1@1575,1480
  Bottom Layer w20: U3.3 358.58,1545.2 345.94,1557.83 345.94,1602.83 363.11,1620 U3.1 526.42,1620 C19.1@528.82,1617.6 ; C19.1 528.82,1628.82 552.6,1652.6 v1(563.82,1652.6) ; F1.2@1629.57,1301.85 F1.2@1635,1301.85
  Bottom Layer w30: v1@1553.7,1493.11 R4.1
  Bottom Layer w70: C1.1@1490,1441.42 C1.1
  other v1: 1550,1475 1580,1475 1550,1505 1580,1505
BOOT0: R24.2 R25.1 U4.44 | length 1115.5
  Bottom Layer w10: U4.44@700.94,907.21 780,907.21 796,891.21 796,841 824,813 920,813 974,759 1002.52,759 1020.77,740.75 1020.77,704.23 1055,670 1055,495 1085,465 R25.1 R24.2
BOOT1: R26.2 R27.1 U4.20 | length 1069
  PWR w10: v1(1325,660) 1325,504 1364,465 v1(1685,465)
  Bottom Layer w10: U4.20 1245.53,848.15 1262.46,831.22 1271.73,821.95 1286.37,807.31 1286.37,688.63 1315,660 v1(1325,660) ; R26.2 R27.1 v1(1685,465)
COEX1: R11.2 U2.83 | length 1258.8
  Top Layer w10: R11.2 55.08,84.92 100,40 340,40 359.34,20.66 1210.66,20.66 1221.77,31.77 U2.83
COEX2: R10.2 U2.84 | length 287.3
  Top Layer w10: R10.2 165.08,103.66 194.84,73.9 U2.84
CTS: U2.67
DCD: U2.70
DTR: U2.72
GND: C1.2 C2.2 C3.2 C4.2 C5.1 C6.1 C7.1 C8.1 C9.2 C10.1 C11.1 C12.1 C15.1 C16.1 C17.2 C18.1 C19.2 C20.2 C21.2 C22.2 C23.1 C24.2 C25.2 C26.1 C27.2 C28.2 C29.2 C30.1 C31.2 C32.2 C33.2 C35.2 C36.2 C37.2 D1.1 D2.1 D3.1 D4.1 D5.1 D6.1 D7.1 D9.1 D10.2 D11.1 J1.5 J2.2 J3.2 J5.5 J5.6 J5.7 J6.15 J6.17 J6.19 J7.3 K1.3 L1.1 L2.1 LD1.K LD4.K Q1.2 Q2.2 Q3.2 Q4.2 R6.1 R7.2 R12.2 R24.1 R26.1 R29.2 U1.3 U1.6 U2.1 U2.2 U2.5 U2.10 U2.14 U2.37 U2.40 U2.41 U2.43 U2.57 U2.58 U2.60 U2.61 U2.64 U2.65 U2.77 U2.78 U2.80 U2.81 U3.2 U4.8 U4.23 U4.47 U5.5 Y2.2 Y2.4 | length 7491.1
  Top Layer w10: 169,241 183,255 272,255 302,225 ; J5.5@214.5,1372.8 260,1372.8 265.82,1366.97 D7.1 ; v1@265.97,1505.97 D6.1
  Top Layer w15: 278.29,688.07 280.43,690.21 ; 1183,1129 U2.61@1183,1272 ; 1359.71,924.29 1360.29,924.29 ; U2.60@1422.87,1042.4 1466.6,1042.4 ; Q1.2 1675,775 v1(1685,785)
  Top Layer w20: U2.1@193.9,1042.4 268.47,1042.4 300,1010.87 ; U2.14 262.69,530.59 ; U2.10 278.5,688.07 ; U2.5 280.43,884.92 ; U2.2 296.46,1003.03 300,1006.58 ; 1259.37,294.37 U2.41 ; 1355.34,963.66 1458.66,963.66 ; 1358.89,373.11 1492.89,373.11 ; 1360.29,924.87 1466.87,924.87 1466.87,1042.13 ; 1610,360 Q2.2 ; 1715,1190 Q3.2
  Top Layer w40: U1.6 1265.22,1560.04 U1.3
  Bottom Layer w10: LD4.K 50,1566.42 68.82,1547.6 v1@83.82,1547.6 ; v1@318.05,368.05 456.95,368.05 485,340 C10.1 C12.1 ; C25.2 380,580 v1@385,575 ; v1(385,565) 400,580 R29.2 ; D11.1 485.57,170.57 490,175 630,175 665,210 J1.5 ; D2.1 259.43,260.57 205,315 205,420 240,455 390,455 410.57,475.57 465.57,475.57 480,490 C11.1 ; v1(510,1340) 515,1335 C29.2 C28.2 ; U4.47 786.26,966.26 ; v1(840,1350) 860,1330 856.95,1326.94 C31.2 ; C31.2@860,1305 882.24,1305 901.12,1286.12 Y2.2 929.57,1244.57 950,1265 C27.2 ; 888,937 912.8,961.8 U4.8 ; 982,843 1000,825 1000,800 1010.91,789.09 1190.91,789.09 1203,777 C36.2 ; v1(1458.82,1230) 1485,1230 1483.82,1231.18 D1.1 ; R24.1 R26.1 ; J6.15 1720,700 ; C8.1 1615,1396 1624,1387 1637,1387 v1(1642,1382)
  Bottom Layer w15: v1(75.94,1367.83) C37.2 ; v1@180,1150 U5.5 ; U3.2 427.4,1582.6 435,1575 435,1550 447.4,1537.6 C19.2 ; D9.1 465,900 490,875 Q4.2@576.81,875 ; v1(510,1050) C35.2 ; Y2.4 806.95,1157.96 v1(821.95,1172.96) ; v1(840,1350) 840,1384.1 K1.3 900,1385 C30.1 ; v1@888,838 888,937 ; v1(888,843) 982,843 ; C4.2 C3.2 1167,1483 v1(1200,1450) ; C21.2 1087.2,1387.2 1115,1415 1115,1463 1135,1483
  Bottom Layer w20: C4.2@1027.73,1661 1027.73,1732 1038.73,1743 1551.65,1743 ; C4.2@1036.73,1699 C4.2@1041.73,1704 ; C6.1 v1(1340,1120) ; C1.2@1490,1734.73 C1.2 1530.37,1706.11 1561,1736.74 1673.26,1736.74 1685,1725 R7.2 1717,1693 1740,1670 1740,1590 1723,1573 R6.1
  other v1: 1625,125 800,225 1000,225 1300,294.37 625,295 1525,350 315,365 800,375 1000,375 1300,375 1715,385 1722,666 485,880 850,915 800,965 1680,980 185,1150 1100,1450 445,1500 258,1508 78.82,1544.6 1100,1550 1200,1550
GPS_ANT: C13.1 U2.79 | length 86.9
  Top Layer w6: C13.1@473.74,1345 C13.1@473.74,1347.34
  Top Layer w10: C13.1@473.74,1347.34 C13.1@473.8,1347.4
  Top Layer w13: U2.79 C13.1@473.74,1347.34
NetC13_2: C13.2 C14.1 L1.2 | length 115
  Top Layer w13: C14.1 C13.2 L1.2
NetC14_2: C14.2 J2.1 L2.2 | length 117
  Top Layer w13: J2.1 C14.2 L2.2
NetC16_2: C16.2 D10.1 J3.1 R14.1 | length 159.4
  Top Layer w6: C16.2@1525.87,201 C16.2
  Top Layer w13: C16.2@1525.87,201 R14.1 J3.1
NetC26_2: C26.2 D9.2 Q4.3 U2.3 | length 418.7
  Top Layer w10: U2.3 255,963.66 v1@275,943.66
  PWR w10: v1@270,938.66 428.66,938.66 v1(440,950)
  Bottom Layer w10: v1(440,950) 596,950 604.81,941.19 Q4.3
  other v1: 275,938.66
NetC33_1: C33.1 U3.4 | length 75.2
  Bottom Layer w20: U3.4 292.64,1521.14 298.82,1514.96 C33.1
NetD5_2: D5.2 J5.1 R12.1 R13.2 | length 263.8
  Top Layer w15: J5.1@214.39,1475.89 214.39,1536.4 226.1,1548.11 231.72,1553.74 408.74,1553.74 R13.2
NetL3_2: L3.2 U4.9 | length 115.7
  Bottom Layer w10: U4.9 932.48,1096.26 961.22,1125 L3.2
NetLD1_A: LD1.A R1.2 | length 65
  Top Layer w10: LD1.A R1.2
NetLD2_A: LD2.A R2.2 | length 70
  Top Layer w10: R2.2 LD2.A LD2.A@1605,623
NetLD2_K: LD2.K Q2.3 | length 86.2
  Top Layer w10: LD2.K 1668,620 Q2.3
NetLD3_A: LD3.A R3.2 | length 60
  Top Layer w10: LD3.A R3.2
NetLD3_K: LD3.K Q1.3 | length 73.3
  Top Layer w10: Q1.3 1645,830 1665,850 LD3.K
NetLD4_A: LD4.A R8.2 | length 60
  Bottom Layer w10: LD4.A R8.2
NetQ3_3: Q3.3 R4.2 U1.1 | length 150.9
  Top Layer w10: U1.1 U1.1@1655,1424.88 ; Q3.3 v1(1685,1385) U1.1@1685,1424
  Bottom Layer w10: v1(1685,1385) R4.2
NetQ6_3: Q6.3 R15.2 R22.2 | length 113.2
  Top Layer w10: R15.2@720,1595 720,1510 735,1495 Q6.3
NetQ7_2: Q7.2 R19.2 R23.1 | length 159.5
  Top Layer w10: Q7.2 853.9,1530 868.9,1545 868.9,1638.9 R23.1 ; R19.2@868.9,1578.9 R19.2
NetR5_1: R5.1 R7.1 U1.5 | length 240.6
  Top Layer w10: v1(1571.9,1693) 1652.8,1693 U1.5 ; U1.5@1671.73,1693 U1.5@1685,1706.27
  Bottom Layer w10: v1(1571.9,1693) 1621.64,1693 R5.1@1681.64,1633 ; R5.1@1679.9,1633 R5.1
NetR16_2: R16.2 U2.17 | length 91.1
  Top Layer w10: U2.17 v1(263.9,412.48)
  Bottom Layer w10: v1(263.9,412.48) R16.2
NetR17_2: R17.2 U2.18 | length 129.3
  Top Layer w10: U2.18 253.9,373.11 v1(263.9,363.11)
  Bottom Layer w10: v1(263.9,363.11) 305,322.01 R17.2
NetR18_2: R18.2 U2.19 | length 340.8
  Top Layer w10: v1@146.26,333.74 U2.19
  Bottom Layer w10: v1(150,335) 150,420 230,500 R18.2
NRST: C30.2 J7.5 K1.4 R20.1 U4.7 | length 884.5
  Bottom Layer w10: J7.5@775,1715 840,1650 K1.4@840,1537.64 ; K1.4@850.9,1526.73 852.64,1525 C30.2 941,1484 941,1354 964.99,1330.01 998.81,1330.01 1018.82,1310 1018.82,1177.6 998.82,1157.6 953.82,1157.6 943.82,1147.6 943.82,1137.6 918.82,1112.6 913.82,1112.6 893.11,1091.89 U4.7
OSC32_IN: C28.1 U4.3 Y1.2 | length 315.3
  Bottom Layer w10: C28.1@580,1169 Y1.2@684.98,1169 ; Y1.2@685,1155 ccw(c735,1155) 735,1105 795,1105 cw(c795,1085) 815,1085 815,1045.63 cw(c814.37,1045.63) U4.3
OSC32_OUT: C29.1 U4.4 Y1.1 | length 458.7
  Bottom Layer w10: C29.1@590,1295 Y1.1@700,1295 ; Y1.1@690,1295 cw(c690,1245) 740,1245 740,1155 ccw(c770,1155) 770,1125 805,1125 cw(c805,1095.94) 834.06,1095.94 U4.4 ccw(c834.06,1045.94) U4.4@835,1045.94
OSC_IN: C31.1 U4.5 Y2.1 | length 300.3
  Bottom Layer w10: Y2.1 C31.1 ; Y2.1@791.94,1244.58 803.74,1244.58 cw(c803.74,1194.58) 828.51,1238.01 cw(c803.74,1194.58) 853.74,1194.58 U4.5
OSC_OUT: C27.1 U4.6 Y2.3 | length 216.6
  Bottom Layer w10: U4.6 873.43,1125.27 cw(c906.12,1125.27) 906.12,1157.96 cw(c943.16,1157.96) 943.16,1195 C27.1
PA1: J6.2 U4.11 | length 441.7
  Bottom Layer w10: U4.11 971.85,1013.15 982,1003 1003,1003 1010,1010 1055,1010 1070,1025 1333,1025 1358,1050
PA4: J6.4 U4.14 | length 380.7
  Bottom Layer w10: U4.14 1321.26,966.26 1355,1000 J6.4@1417.32,1000
PA5: J6.6 U4.15 | length 363.3
  Bottom Layer w10: U4.15 J6.6@1413.9,946.57
PA6: J6.8 U4.16 | length 377.9
  Bottom Layer w10: U4.16 1313.27,926.89 1340.16,900 J6.8@1417.32,900
PA7: J6.10 U4.17 | length 390.4
  Bottom Layer w10: U4.17 1293.58,907.2 1350.79,850 J6.10@1417.32,850
PA8: J4.12 U4.29 | length 1098.9
  PWR w10: v1(60.67,815) 715.35,815 775.35,755 870,755 v1(900,785)
  Bottom Layer w10: v1(60.67,815) 100,815 115,800 J4.12@196.85,800 ; v1(900,785) 912.8,772.2 U4.29
PA11: J6.16 U4.32 | length 1080.5
  PWR w10: v1(1300,430) 1297,433 1297,672 v1(1320,695)
  Bottom Layer w10: U4.32 853.74,466.26 890,430 v1(1300,430) ; v1(1320,695) 1412.32,695 J6.16@1417.32,700
PA12: J4.6 U4.33 | length 1119.6
  PWR w10: v1(60.67,950) 190,950 225,985 455,985 500,940 510.36,940 512.52,937.83 725.8,937.83 790,873.63 v1(790,785)
  Bottom Layer w10: v1(60.67,950) J4.6 ; v1(790,785) 790,770 808.31,751.69 823.31,751.69 834.06,740.94 U4.33
PA15: J4.11 U4.38 | length 366.1
  Bottom Layer w10: J4.11@354.33,800 626.43,800 637.34,789.09 U4.38
PB0: J6.12 U4.18 | length 403
  Bottom Layer w10: U4.18 1269.96,887.52 1357.48,800 J6.12@1417.32,800
PB1: J6.14 U4.19 | length 438.2
  Bottom Layer w10: U4.19 1256.28,867.83 1315.66,808.46 1315.66,764.34 1330,750 J6.14
PB3: J4.9 U4.39 | length 358
  Bottom Layer w10: J4.9@375,850 410,850 440,820 634.72,820 645.94,808.78 U4.39
PB4: J4.7 U4.40 | length 391.2
  Bottom Layer w10: J4.7@354.33,900 415,900 475,840 643,840 654.54,828.46 U4.40
PB5: J4.10 U4.41 | length 796.7
  PWR w10: v1(60.67,850) 661.81,850 v1(667.17,855.35)
  Bottom Layer w10: v1(60.67,850) J4.10@196.85,850 ; v1(667.17,855.35) 677.17,855.35 684.37,848.15 U4.41
PB6: J4.8 U4.42 | length 897.5
  PWR w10: v1(60.67,900) 450,900 465,915 500,915 515,900 724.78,900 v1@756.44,868.33
  Bottom Layer w10: v1(60.67,900) J4.8@196.85,900 ; U4.42 v1(755.94,867.83)
PB8: J4.5 U4.45 | length 407.3
  Bottom Layer w10: J4.5@354.33,950 405,950 415,960 415,965 440,990 604.89,990 668,926.89 U4.45
PB9: J4.3 U4.46 | length 396.2
  Bottom Layer w10: J4.3@354.33,1000 410,1000 425,1015 616,1015 684.43,946.57 U4.46
PB12: J4.17 U4.25 | length 857.1
  PWR w10: v1(380,620) 380,615.35 450,545.35 966.02,545.35 1017.17,596.5 v1(1017.17,635.35)
  Bottom Layer w10: J4.17@354.33,650 380,624.33 v1(380,620) ; U4.25 991.54,685.98 1017.17,660.35 v1(1017.17,635.35)
PB13: J4.18 U4.26 | length 1209.6
  PWR w10: v1(60.67,650) 393.23,650 467.88,575.35 951.02,575.35 982.17,606.5 v1@982.17,660.35
  Bottom Layer w10: v1(60.67,650) J4.18@196.85,650 ; U4.26 971.85,670.67 v1@982.17,660.35
  other v1: 982.17,655.35
PB14: J4.16 U4.27 | length 1157.7
  PWR w10: v1(60.67,700) 385,700 480,605 930.67,605 v1(950.67,625)
  Bottom Layer w10: v1(60.67,700) J4.16@196.85,700 ; v1@952.17,626.5 U4.27
PB15: J4.14 U4.28 | length 1116.9
  PWR w10: v1(60.67,740) 395,740 504.65,630.35 897.17,630.35 v1(922.17,655.35)
  Bottom Layer w10: v1(60.67,740) 85,740 95,750 J4.14@196.85,750 ; v1(922.17,655.35) 922.17,660.35 932.48,670.67 U4.28
PF6: J4.15 R28.1 | length 225.5
  Bottom Layer w10: J4.15@354.33,700 430,700 490,640 R28.1
PF7: J4.13 R30.1 | length 261.4
  Bottom Layer w10: J4.13@354.33,750 430,750 480,700 R30.1 ; 480,705 520,705
PIN35: R28.2 R29.1 U4.35 | length 292.6
  Bottom Layer w10: R29.1 R28.2 782,640 794.69,652.68 U4.35
PIN36: R30.2 R31.1 U4.36 | length 242.4
  Bottom Layer w10: R30.2 650,675 766,675 775,684 U4.36 ; R30.2@625,708 R31.1
PWRKEY: Q4.1 U4.43 | length 84.3
  Bottom Layer w10: Q4.1@636.81,875 649.33,887.52 U4.43
PWRON: Q3.1 U4.10 | length 901.2
  Top Layer w10: v1(1655,1215) Q3.1
  Bottom Layer w10: U4.10 952.17,1080.51 956.65,1085 1075,1085 1100,1060 1320,1060 1350,1090 1485,1090 1510,1115 1510,1185 1540,1215 v1(1655,1215) ; v1@1654.62,1210.45 v1@1660,1210
RI: U2.69
RTS: U2.66
RXD: C18.2 Q7.3 R21.2 U2.68 | length 288.2
  Top Layer w10: U2.68 906.81,1323.19 888.9,1341.1 888.9,1385 883.9,1390 Q7.3 943,1430.74 952.44,1440.18 R21.2 ; 950,1437.74 961.46,1437.74 R21.2@968.9,1445.18
RXD2_MCU: U4.31 U5.1 | length 1098.3
  PWR w10: v1(305.94,1237.83) 305.94,1147.83 345.94,1107.83 375,1107.83 513.12,969.71 720.81,969.71 825,865.52 v1(825,785)
  Bottom Layer w10: v1(305.94,1237.83) 305.94,1322.83 333.11,1350 U5.1 ; v1(825,785) 828,785 873.43,739.57 U4.31
RXD3_MCU: J6.20 U4.22 | length 544
  Bottom Layer w10: U4.22 1221.22,808.78 1245,785 1245,630 1275,600 J6.20@1417.32,600
RXD_MCU: R22.1 U4.13 | length 762.4
  Top Layer w10: v1@790,1505 R22.1@790,1535
  PWR w10: v1(790,1500) 790,1260 914.75,1135.25 914.75,1085 1004.75,995 v1(1095,995)
  Bottom Layer w10: U4.13 1085.94,985.94 v1(1095,995)
SIM_CLK: C11.2 D3.2 J1.3 R18.1 | length 365.9
  Bottom Layer w10: R18.1 400,500 D3.2@420,520 ; D3.2 585,520 600,505 C11.2 650,490 680,460 J1.3
SIM_DATA: C12.2 D4.2 J1.7 R16.1 | length 350.8
  Bottom Layer w10: 393.9,412.48 477.48,412.48 510,445 595,445 610,430 C12.2@610,415 ; C12.2@610,410 J1.7
SIM_RST: C10.2 D2.2 J1.2 R17.1 | length 376.7
  Bottom Layer w10: R17.1 588,305 600,317 C10.2@600,345 ; C10.2@600,339 627,339 648,360 J1.2
SIM_VDD: C2.1 C9.1 D11.2 J1.1 U2.20 | length 651.4
  Top Layer w20: v1@153.9,284.37 163.9,294.37 U2.20@193.9,294.37
  Bottom Layer w20: v1(155,285) 155,260 200,215 470,215 500,245 C2.1@515,245 ; C2.1 650,245 665,260 J1.1
SWCLK: J7.4 U4.37 | length 1740.9
  PWR w10: v1(441.95,1414.57) 441.95,1164.57 586.95,1019.57 785.43,1019.57 930,875 930,765 895.57,730.57 v1(716.95,730.57)
  Bottom Layer w10: v1(441.95,1414.57) 481.95,1454.57 664.57,1454.57 675,1465 J7.4@675,1715 ; v1@715.94,730.57 v1@716.95,729.57 ; U4.37@715.94,768.41 U4.37 716.95,768.41 v1(716.95,730.57)
SWDIO: J7.2 U4.34 | length 1935.2
  Top Layer w10: J7.2@452.37,1715 J7.2@475,1715
  PWR w10: v1(551.95,1424.57) 551.95,1099.57 606.95,1044.57 785.43,1044.57 ; 790.43,1044.57 956.15,878.85 956.15,751.15 863.93,658.93 v1(827.59,658.93)
  Bottom Layer w10: J7.2 519.57,1749.57 706.95,1749.57 726.95,1729.57 726.95,1446.94 704.57,1424.57 v1(551.95,1424.57) ; U4.34 814.37,672.15 v1(827.59,658.93)
TXD: C17.1 Q6.2 U2.71 | length 176.9
  Top Layer w10: Q6.2 778.7,1416.3 778.7,1335.3 788.7,1325.3 U2.71
TXD2_MCU: U4.30 U5.4 | length 828.4
  PWR w10: v1(405,1170) 405,1115 525.43,994.57 730.94,994.57 858,867.52 858,791 v1(864,785)
  Bottom Layer w10: v1(405,1170) U5.4 405,1183.78 ; v1(864,785) 864,781 893.11,751.89 U4.30
TXD3_MCU: J6.18 U4.21 | length 538.6
  Bottom Layer w10: U4.21 1235.37,828.46 1241.13,822.71 1251.33,812.51 1265.69,798.15 1265.69,659.31 1295,630 1338.66,630 1358.66,650 J6.18@1417.32,650
TXD_MCU: R19.1 U4.12 | length 622.2
  Top Layer w10: R19.1 v1(980,1580)
  PWR w10: v1(980,1580) 980,1086.54 v1(1021.54,1045)
  Bottom Layer w10: U4.12 v1(1021.54,1045)
VBAT: J4.1 U4.1 | length 472.4
  Bottom Layer w10: J4.1@354.33,1050 455,1050 515,1110 625,1110 690,1045 U4.1
VCC_5V: F1.1 J6.1 J6.3
VDD1V8: Q6.1 Q7.1 R10.1 R11.1 R21.1 U2.15 | length 2904.1
  Top Layer w20: R11.1 R10.1 120.08,229.92 105,245 105,445 v1(150,490) ; v1@150,491.22 U2.15@193.9,491.22 ; Q6.1 705,1415 715,1405 v1(730,1405) ; Q7.1@915,1495 930,1495 945.18,1510.18 R21.1 ; 940,1505 v1(940,1540)
  PWR w30: v1(150,490) 1020,490 1105,575 1105,845 825,1125 800,1125 730,1195 730,1505 765,1540 v1(940,1540)
pads on no net: J1.0 J1.6 J5.4 J6.5 J6.11 J6.13 K1.1 K1.2 U2.4 U2.6 U2.7 U2.8 U2.9 U2.16 U2.21 U2.22 U2.23 U2.24 U2.25 U2.26 U2.27 U2.28 U2.29 U2.30 U2.31 U2.32 U2.33 U2.34 U2.35 U2.36 U2.42 U2.44 U2.45 U2.46 U2.47 U2.48 U2.50 U2.52 U2.53 U2.54 U2.55 U2.56 U2.59 U2.73 U2.74 U2.75 U2.76 U2.85 U2.86 U2.87
copper on no net:
  other v1: 0,0 0,0 0,0

## Polygon pours and split planes (outlines as drawn)
GND on Top Layer "Top Layer-No Net 4" (solid, remove dead copper, pour order 1000): -115,1890 1745,1890 1845,1790 1845,-5 1780,-70 -10,-70 -145,65
GND on Top Layer "Top Layer-No Net" (solid, remove dead copper, pour order 1000): 1240,289.74 1416.86,289.74 1475.36,378.21 1489.77,400 1817.22,400 1817.22,369.4 1825,357.64 1825,36.66 1819.56,28.43 1817.22,24.89 1817.22,-8.07 1817.22,-14.2 1804.59,-33.3 1669.91,-33.3 1615.49,-115.6 1605.97,-130 1435.91,-130 1426.38,-130 1369.24,-43.58
GND on Top Layer "Top Layer-No Net 8" (solid, remove dead copper, pour order 1003): 402.11,1648.1 612.11,1648.1 636.78,1623.43 636.78,1397.62 568,1328.84 557,1317.84 557,1257.84 557,1234.01 544.7,1221.72 537.11,1214.12 537.11,1146.08 537.11,1143.82 544.7,1136.23 544.7,1122.54 538,1115.84 393,1115.84 387,1121.84 387,1136 387.22,1136.23 398,1147 398,1206.84 398,1212.07 388.35,1221.72 388.35,1634.34 397.11,1643.1
+5V on Top Layer "Top Layer-No Net 1" (solid, remove dead copper, pour order 1000): 1689,1513 1592,1513 1585,1520 1584,1521 1554,1521 1545,1512 1545,1511 1545,1469 1551,1463 1587,1463 1598,1474 1601,1477 1694,1477
+3.8V on Top Layer "Top Layer-No Net 2" (solid, remove dead copper, pour order 1000): 1605.01,1606.28 1595.01,1606.28 1585.01,1596.28 1540.01,1596.28 1530.01,1596.28 1520.01,1606.28 1520.01,1641.28 1535.01,1656.28 1590.01,1656.28 1600.01,1646.28 1615.01,1646.28
+3.8V on Top Layer "Top Layer-No Net 3" (solid, remove dead copper, pour order 1000): 1095,1290 1095,1170 1100,1165 1105,1160 1155,1160 1160,1165 1160,1210 1160,1230 1145,1245 1145,1290
+3.3V on PWR "PWR-No Net 2" (solid, remove dead copper, pour order 1003): -90.82,1790.49 1784.18,1790.49 1849.18,1725.49 1849.18,680.49 1814.18,645.49 54.18,645.49 -110.82,810.49 -140.82,840.49 -140.82,1770.49
+5V on PWR "Bottom Layer-No Net 6" (solid, remove dead copper, pour order 1002): 1610,1525 1610,1455 1590,1435 1545,1435 1515,1465 1365,1615 1115,1615 1057.6,1615 1025,1647.6 950,1647.6 917.4,1615 880,1615 545,1615 540,1620 540,1645 540,1650 550,1660 555,1665 615,1665 840,1665 875,1700 880,1705 1015,1705 1430,1705 1610,1525
+3.8V on PWR "PWR-No Net 1" (solid, remove dead copper, pour order 1001): 1100,1235 1090,1235 1080,1225 1080,1085 1115,1050 1150,1015 1150,875 1150,370 1060,280 1060,135 1075,120 1210,120 1270,180 1270,1210 1245,1235
GND on GND "GND-No Net" (solid, remove dead copper, pour order 1004): 10,1820 1745,1820 1905,1660 1905,-85 1860,-130 -5,-130 -85,-50 -85,1720 -20,1785
GND on Bottom Layer "Bottom Layer-No Net 8" (solid, remove dead copper, pour order 1005): -108.59,1843.74 -108.59,33.74 -23.59,-51.26 1761.41,-51.26 1861.41,48.74 1861.41,1713.74 1756.41,1818.74
+3.8V on Bottom Layer "Bottom Layer-No Net 4" (solid, remove dead copper, pour order 1003): 1615.73,1647 1612.73,1650 1502.73,1650 1430.73,1650 1362.73,1718 1268.73,1718 1261.73,1711 1261.73,1342 1239.73,1320 1239.73,1226 1247.73,1218 1352.73,1218 1386.73,1252 1386.73,1509 1430.73,1553 1432.73,1555 1625.73,1555 1625.73,1637 1620.73,1642
VCC_5V on Bottom Layer "Bottom Layer-No Net" (solid, remove dead copper, pour order 1002): 1535,1065 1535,990 1540,985 1650,985 1690,1025 1695,1030 1695,1130 1575,1130 1570,1125 1565,1120 1565,1110 1565,1095 1535,1065 1535,1045
+5V on Bottom Layer "Bottom Layer-No Net 3" (solid, remove dead copper, pour order 1003): 1465,1505 1523.59,1505 1537.7,1519.11 1620.7,1519.11 1629.7,1510.11 1630,1509.81 1630,1475 1598.59,1475 1585.7,1462.11 1570,1446.41 1570,1405 1615,1360 1620,1355 1670,1355 1670,1310 1660,1300 1645,1315 1565,1315 1450,1430 1450,1460
+3.8V on Bottom Layer "Bottom Layer-No Net 1" (solid, remove dead copper, pour order 1004): 1100,1170 1110,1160 1250,1160 1335,1160 1380,1205 1386.73,1211.73 1386.73,1252 1386.73,1358.27 1375,1370 1310,1435 1305,1435 1230,1360 1200,1360 1200,1260 1180,1240 1175,1235 1110,1235 1100,1225 1100,1170
+3.8V on Bottom Layer "PWR-No Net" (solid, pour order 1005): 1510,110 1570,110 1595,85 1595,45 1590,40 1315,40 1260,95 1250,105 1085,105 1075,115 1075,150 1075,160 1095,180 1315,180 1375,120 1385,110 1570,110

## Keep-outs
Keep-Out Layer:
  circle w10: c805,2148 r30
  circle w10: c961,2181 r30
  circle w6: c78.74,1692.91 r47.24
  circle w6: c1692.91,78.74 r47.24
  lines w8: 0,78.74 ccw(c78.74,78.74) 78.74,0 1692.91,0 ccw(c1692.91,78.74) 1771.65,78.74 1771.65,1692.91 ccw(c1692.91,1692.91) 1692.91,1771.65 78.74,1771.65 ccw(c78.74,1692.91) 0,1692.91 0,78.74

## Silkscreen, mask and mechanical layers (free items; w line width, h text height)
Top Overlay:
  text "GND" at 541,1637 h32
  text "DIO" at 435,1635 h32
Bottom Overlay:
  text "3.3V" at 310,1755 h32 r90
  text "NRST" at 955,1675 h32
  text "CLK" at 715,1615 h32
  text "VBAT" at 470,1075 h32
  text "485A" at 135,1035 h32
  text "PA1" at 1350,1035 h32
  text "5V" at 1695,1035 h32
  text "485B" at 135,985 h32
  text "PA4" at 1350,985 h32
  text "5V" at 1695,985 h32
  text "PA12" at 135,935 h32
  text "PA5" at 1350,935 h32
  text "PB6" at 135,885 h32
  text "PA6" at 1350,885 h32
  text "3.3V" at 1755,885 h32
  text "PB5" at 135,835 h32
  text "PA7" at 1350,835 h32
  text "3.3V" at 1755,835 h32
  text "PB8" at 135,785 h32
  text "PB0" at 1350,785 h32
  text "PB15" at 135,735 h32
  text "PB1" at 1350,735 h32
  text "PB14" at 135,685 h32
  text "PA11" at 1350,685 h32
  text "GND" at 1730,685 h32
  text "TXD3" at 1350,640 h32
  text "PB13" at 135,635 h32
  text "GND" at 1730,635 h32
  text "GND" at 1730,585 h32
  text "4GModule_V2.0.1" at 90,560 h70 r90
Mechanical 1:
  circle w6: c1692.91,78.74 r47.24
  circle w6: c78.74,1692.91 r47.24
  lines w8: 0,78.74 ccw(c78.74,78.74) 78.74,0 1692.91,0 ccw(c1692.91,78.74) 1771.65,78.74 1771.65,1692.91 ccw(c1692.91,1692.91) 1692.91,1771.65 78.74,1771.65 ccw(c78.74,1692.91) 0,1692.91 0,78.74

## Text inside footprints (layer, text, board x,y; h text height)
J5: Top Overlay "1" at 149.29,1489.99 h30 r270; Top Overlay "5" at 150.29,1378.99 h30 r270
U1: Top Overlay "1" at 1563.98,1388.7 h30 r90